# EAGLE board Battery Detector v1.0 (EAGLE 8.1.1)
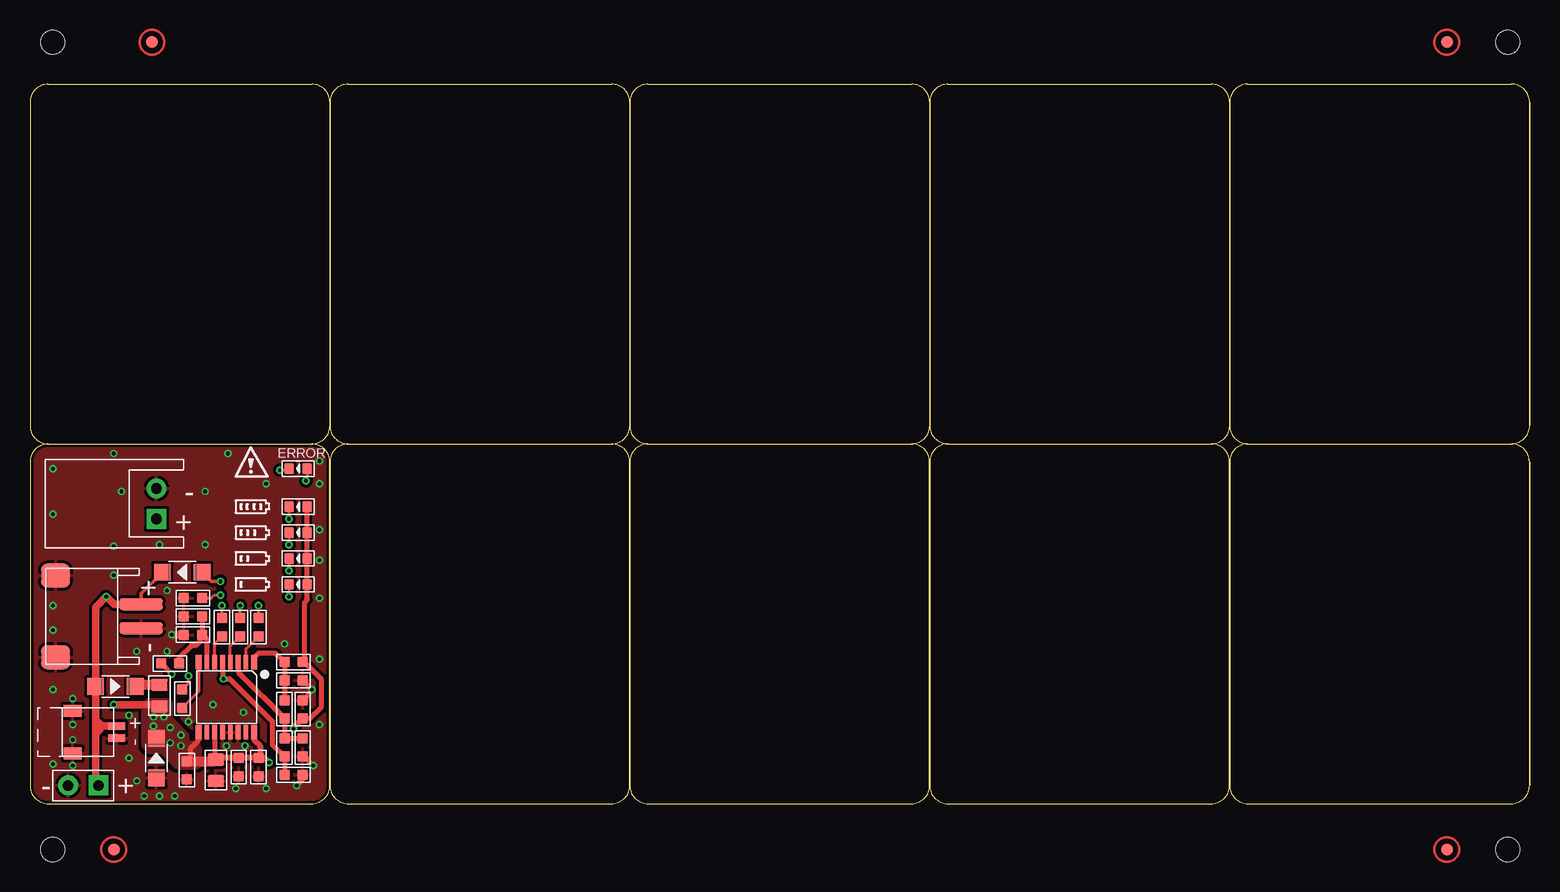
[diagram p0: board, top side]
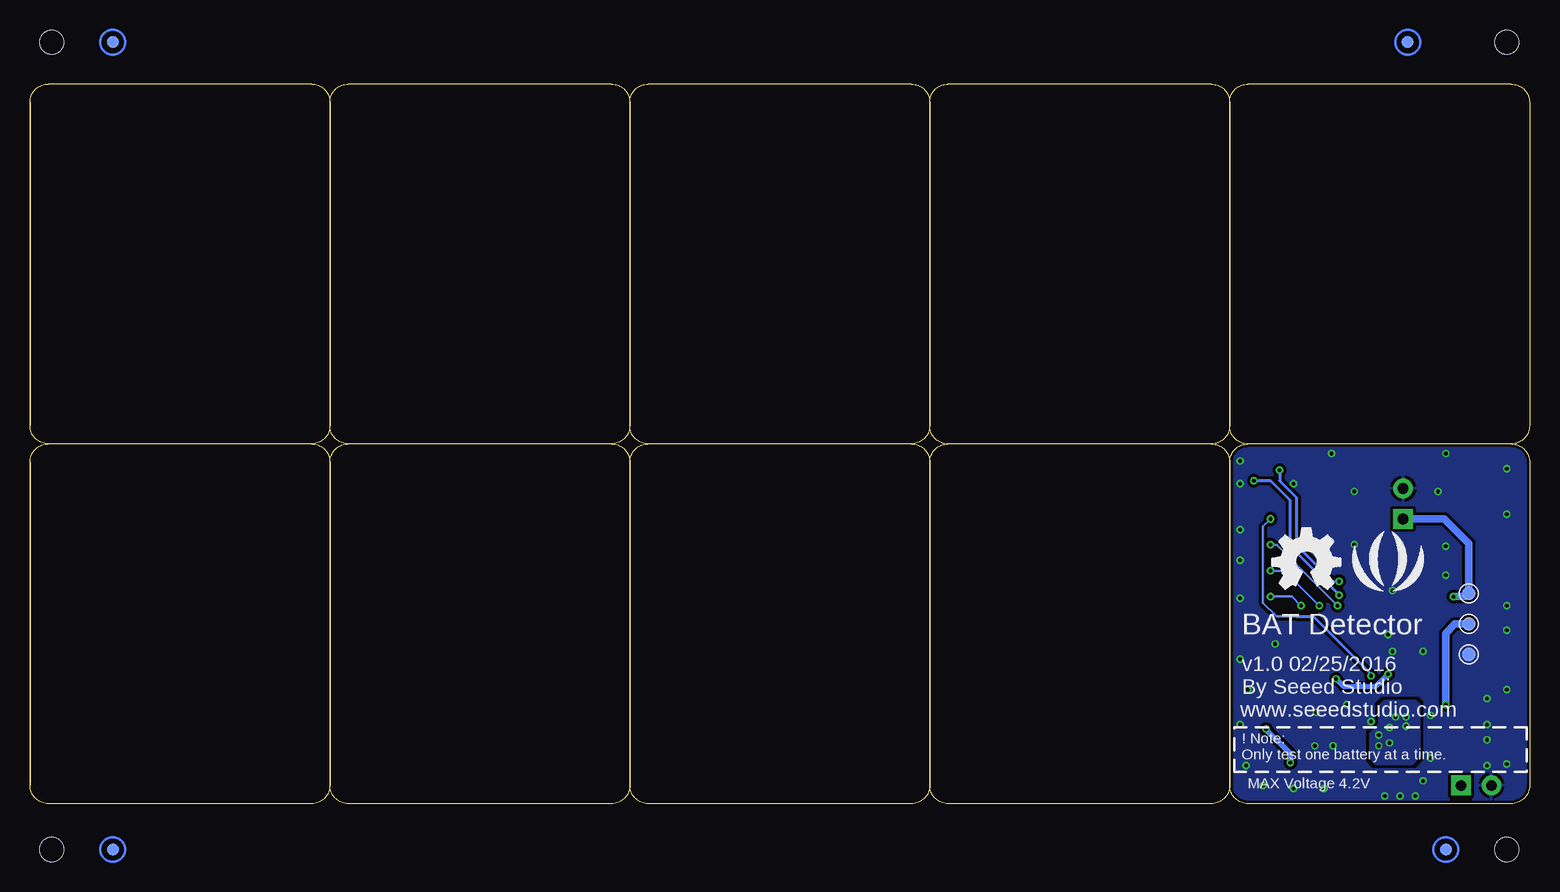
[diagram p1: board, bottom side, seen from below]

Size 125.01 x 60 mm. Coordinates in mm from the lower left corner, seen from the top.
Outline: 25,1.52 arc-90 23.48,0 1.52,0 arc-90 0,1.52 0,28.48 arc-90 1.52,30 23.48,30 arc-90 25,28.48
Outline: 25,1.52 25,28.48
Outline: 25,28.48 25,1.52
Outline: 25,1.52 arc90 26.52,0 48.48,0 arc90 50,1.52 50,28.48 arc90 48.48,30 26.52,30 arc90 25,28.48
Outline: 75,1.52 arc-90 73.48,0 51.52,0 arc-90 50,1.52 50,28.48 arc-90 51.52,30 73.48,30 arc-90 75,28.48
Outline: 75,1.52 75,28.48
Outline: 75,28.48 75,1.52
Outline: 75,1.52 arc90 76.52,0 98.48,0 arc90 100,1.52 100,28.48 arc90 98.48,30 76.52,30 arc90 75,28.48
Outline: 125,1.53 arc-90 123.48,0 101.53,0 arc-90 100,1.53 100,28.48 arc-90 101.53,30 123.48,30 arc-90 125,28.48
Outline: 125,1.53 125,28.48
Outline: 125,28.48 125,1.53
Outline: 25.01,31.52 arc-90 23.48,30 1.53,30 arc-90 0.01,31.52 0.01,58.48 arc-90 1.53,60 23.48,60 arc-90 25.01,58.48
Outline: 25.01,31.52 25.01,58.48
Outline: 25.01,58.48 25.01,31.52
Outline: 25.01,31.52 arc90 26.53,30 48.48,30 arc90 50.01,31.52 50.01,58.48 arc90 48.48,60 26.53,60 arc90 25.01,58.48
Outline: 75.01,31.52 arc-90 73.48,30 51.53,30 arc-90 50.01,31.52 50.01,58.48 arc-90 51.53,60 73.48,60 arc-90 75.01,58.48
Outline: 75.01,31.52 75.01,58.48
Outline: 75.01,58.48 75.01,31.52
Outline: 75.01,31.52 arc90 76.53,30 98.48,30 arc90 100.01,31.52 100.01,58.48 arc90 98.48,60 76.53,60 arc90 75.01,58.48
Outline: 125.01,31.53 arc-90 123.48,30 101.53,30 arc-90 100.01,31.53 100.01,58.48 arc-90 101.53,60 123.48,60 arc-90 125.01,58.48
Outline: 125.01,31.53 125.01,58.48
Outline: 125.01,58.48 125.01,31.53
Copper layers (1*16): Top 0.035mm / dielectric 1.5mm / Bottom 0.035mm
Design rules "SeeedStudio_2layer_DRU_no_angle_20140221 *": minimum track width 5mil, minimum drill 12mil, track to track 6mil, track to pad 6mil, pad to pad 6mil, via to via 6mil, smd to smd 0mil, copper to edge 10mil, drill to drill 10mil, minimum pad ring 10mil, minimum via ring 6mil, stop-mask expansion 2mil, vias tented up to drill 25mil, thermal gap 10mil
Holes 2 mm at 1.91,-3.81 123.19,-3.81 123.19,63.5 1.91,63.5

## Footprints (pad centres in the part's own frame; a part is rotated, then mirrored left to right if it is on the bottom)
C0603 = smd 0.889 x 0.889: 1 0,0.762; 2 0,-0.762
C0805 = smd 1.397 x 1.016: 1 0,0.889; 2 0,-0.889
LED-0603 = smd 0.762 x 0.889: + -0.762,0; - 0.762,0
SOD-123 = smd 1.397 x 1.397: + -1.651,0; - 1.651,0
HW2-SMD-1.0-90D = smd 1.524 x 1.016: 3 -3.429,1.778; 4 -3.429,-1.778 | smd 1.397 x 0.635: + 0.254,0.508; - 0.254,-0.508
HW2-SMD-2.0-90D = smd 2 x 2.4: 3 3.4,-2.181; 4 -3.4,-2.181 | smd 1 x 3.6: + -1,4.953; - 1,4.953
JST2-2.54-90D = drill 0.889 pad 1.651 square: + 2.286,-1.27 | drill 0.889 pad 1.651: - 2.286,1.27
H2-2.54 = drill 0.889 pad 1.651 square: 1 0,1.27 | drill 0.889 pad 1.651: 2 0,-1.27
ROUND-MARK-1.0 = smd 1.016 x 1.016: P$1 0,0
R0603 = smd 0.889 x 0.889: 1 0,0.762; 2 0,-0.762
R0805 = smd 1.397 x 1.016: 1 0,0.889; 2 0,-0.889
TP-D45MIL = smd 1.143 x 1.143: T 0,0
TSSOP16-0.65-5X4.4MM = smd 0.5 x 1.2: 1 -2.325,-2.925; 8 2.325,-2.925; 9 2.325,2.925; 16 -2.325,2.925 | smd 0.4 x 1.2: 2 -1.625,-2.925; 3 -0.975,-2.925; 4 -0.325,-2.925; 5 0.325,-2.925; 6 0.975,-2.925; 7 1.625,-2.925; 10 1.625,2.925; 11 0.975,2.925; 12 0.325,2.925; 13 -0.325,2.925; 14 -0.975,2.925; 15 -1.625,2.925

## Placement (x,y rotation side)
C1  DNP  [C0603]  17.4,3.05 180 top
C2  100nF  [C0603]  19.05,3.05 180 top
C3  10uF  [C0805]  15.49,2.79 0 top
C4  100nF  [C0603]  13.08,2.79 180 top
C5  DNP  [C0603]  22.73,7.87 0 top
C6  DNP  [C0603]  21.97,10.29 270 top
C7  DNP  [C0603]  22.73,4.7 180 top
C8  DNP  [C0603]  21.97,2.41 270 top
C9  DNP  [C0603]  13.59,14.1 90 top
D1  Green  [LED-0603]  22.35,18.29 180 top
D2  Green  [LED-0603]  22.35,20.45 180 top
D3  Green  [LED-0603]  22.35,22.61 180 top
D4  Green  [LED-0603]  22.35,24.77 180 top
D6  B5819W  [SOD-123]  7.11,9.78 0 top
D7  B5819W  [SOD-123]  12.7,19.3 180 top
D8  MMSZ4689  [SOD-123]  10.54,3.81 90 top
ERROR  RED  [LED-0603]  22.35,27.94 180 top
FR1  [SEEEDSTUDIO-PCB-FRAME]  2.67,-56.01 0 top  (outside the outline)
FR2  [SEEEDSTUDIO-PCB-FRAME]  5.97,-46.74 0 top  (outside the outline)
J1  JST-2P-SMD'1.0  [HW2-SMD-1.0-90D]  6.99,5.97 0 top
J2  JST-2P-SMD'2.0  [HW2-SMD-2.0-90D]  4.32,15.62 270 top
J3  JST-2P-DIP'2.54/90D'  [JST2-2.54-90D]  8.26,25.02 0 top
J4  DNP  [H2-2.54]  4.45,1.52 270 top
P1  [ROUND-MARK-1.0]  10.16,63.5 270 bottom  (outside the outline)
P2  [ROUND-MARK-1.0]  10.16,63.5 90 top  (outside the outline)
P3  [ROUND-MARK-1.0]  6.99,-3.81 270 bottom  (outside the outline)
P4  [ROUND-MARK-1.0]  6.99,-3.81 90 top  (outside the outline)
P5  [ROUND-MARK-1.0]  118.11,-3.81 270 bottom  (outside the outline)
P6  [ROUND-MARK-1.0]  118.11,-3.81 90 top  (outside the outline)
P7  [ROUND-MARK-1.0]  118.11,63.5 270 bottom  (outside the outline)
P8  [ROUND-MARK-1.0]  118.11,63.5 90 top  (outside the outline)
R1  430k  [R0603]  21.97,11.81 90 top
R2  22k  [R0603]  21.21,7.87 180 top
R3  15k  [R0603]  21.21,4.7 180 top
R4  18k  [R0603]  11.68,11.68 270 top
R5  270k  [R0603]  13.59,15.62 90 top
R6  510R  [R0603]  17.53,14.73 180 top
R7  510R  [R0603]  16,14.73 180 top
R8  510R  [R0603]  12.7,8.76 180 top
R9  510R  [R0603]  19.05,14.73 180 top
R10  1k  [R0603]  13.59,17.14 270 top
R11  22R  [R0805]  10.79,9.02 180 top
TP1  DNP  [TP-D45MIL]  5.08,17.53 0 bottom
TP2  DNP  [TP-D45MIL]  5.08,12.45 0 bottom
TP3  DNP  [TP-D45MIL]  5.08,14.99 0 bottom
U1  CN1185  [TSSOP16-0.65-5X4.4MM]  16.38,8.89 180 top
U$7  [SEEED-SILK-280*268MIL]  11.81,19.43 0 bottom
U$8  [OSHW_FILLX200_NOTEXT]  21.44,17.91 0 bottom

## Library data of the parts
C1-C9 D1-D4 D6-D8 ERROR R1-R11 TP1-TP3 = Discrete-new
FR1 FR2 = moudle-new
J1-J4 = Connector-new
P1-P8 = Discrete-new; PARTNO: DNP
U1 = template; MPN: CN1185
U$7 U$8 = Logo

## Nets
GND: C1.1 C2.1 C3.2 C4.1 C5.1 C6.1 C7.1 C8.1 C9.1 D8.+ J1.3 J1.4 J1.- J2.3 J2.4 J2.- J3.- J4.2 R5.1 R10.2 TP2.T U1.12 U1.13 U1.14
N$1: R7.1 U1.6
N$2: D6.- R11.2
N$3: C6.2 R1.1 R2.2 U1.1
N$4: C7.2 R2.1 R3.2 U1.3
N$5: C8.2 R3.1 R4.2 U1.5
N$6: R9.1 U1.2
N$7: R6.1 U1.4
N$8: R8.1 U1.8
N$9: D6.+ D7.- J1.+ J2.+ J3.+ J4.1 TP1.T
N$10: D1.- R9.2
N$11: C9.2 R4.1 R5.2 U1.7
N$12: D2.- R6.2
N$14: D3.- R7.2
N$16: D4.- R8.2
N$17: ERROR.+ R10.1
N$18: D7.+ ERROR.-
VCC: C1.2 C2.2 C3.1 C4.2 C5.2 D1.+ D2.+ D3.+ D4.+ D8.- R1.2 R11.1 TP3.T U1.9 U1.11 U1.16

## Tracks (layer width: path | path; a pad name or v marks a point on that pad's centre or on a via)
GND  (via drill 0.3)
  Top 0.406: C6.1 v23.5,9.53 23.5,9.4 C5.1 | C7.1 22.86,3.94 v23.62,3.17 | C8.1 22.73,2.03 v22.23,1.52
  Top 0.61: C9.1 v11.81,14.1
  other vias: 19.68,26.67 14.61,26.04 21.21,13.34 8.89,12.7 11.43,12.7 1.91,9.53 1.91,3.3 8.26,3.81 8.26,7.37 13.21,6.86 15.24,8.26 17.78,7.62 8.89,1.91 17.14,1.27 19.68,1.27 24.13,6.6 6.99,21.46 6.99,19.05 10.79,21.59 1.91,24.13 1.91,27.94 1.91,16.51 1.91,14.48 6.99,29.21 16.51,29.21 24.13,28.57 24.13,26.67 24.13,22.86 24.13,20.32 24.13,17.14 24.13,12.06 14.61,21.59 11.43,17.78 16.38,4.83 17.91,4.83 3.56,5.33 3.56,6.6 3.56,8.76 3.56,3.17 7.62,26.04 10.79,0.64 9.53,0.64 12.06,0.64
  pour Top (isolate 0.254, rank 3): 3.81,30.86 25.91,30.86 25.91,-0.76 -1.27,-0.76 -1.27,30.99 3.81,30.99
  pour Bottom (isolate 0.254, rank 3): 4.57,31.24 26.67,31.24 26.67,-0.38 -0.51,-0.38 -0.51,31.37 4.57,31.37
N$1
  Top 0.254: U1.6 15.41,13.38 R7.1
N$2
  Top 0.813: R11.2 8.89,9.91 D6.-
N$3
  Top 0.406: U1.1 18.71,12.23 19.05,12.57 20.45,12.57 R1.1 C6.2 R2.2
N$4
  Top 0.406: C7.2 R3.2 R2.1 17.36,10.96 U1.3
N$5  (via drill 0.3)
  Top 0.406: U1.5 16.06,10.48 v16.13,10.41 16.64,10.41 20.19,6.86 20.19,4.95 R3.1 C8.2 | R4.2 v11.81,10.79
  Bottom 0.406: v16.13,10.41 15.49,9.78 12.83,9.78 v11.81,10.79
N$6
  Top 0.254: U1.2 18.01,12.93 R9.1
N$7
  Top 0.254: U1.4 16.71,13.15 R6.1
N$8
  Top 0.254: U1.8 14.06,9.36 R8.1
N$9  (via drill 0.3)
  Top 0.305: D7.- 9.27,17.53 J2.+
  Top 0.61: J2.+ 7,16.62 v6.35,17.27 5.46,16.38 D6.+ 5.46,6.99 | 5.46,6.99 5.46,6.35 | 5.46,6.35 5.46,1.78 J4.1 | J1.+ 6.1,6.48 | 5.97,6.48 5.59,6.48 5.46,6.35 | 6.1,6.48 5.97,6.48 | 5.97,6.48 5.46,6.99 | 6.1,6.48 5.59,5.97
  Bottom 0.61: v6.35,17.27 5.33,17.27 TP1.T 5.08,21.72 7.11,23.75 J3.+
N$10  (via drill 0.3, 0.3 pad 0.64)
  Top 0.203: v21.59,17.27 D1.-
  Top 0.254: R9.2 v19.05,16.51
  Bottom 0.203: v19.05,16.51 19.81,17.27 v21.59,17.27
N$11
  Top 0.406: U1.7 14.76,13.69 C9.2 | R5.2 C9.2 | R4.1 12.45,12.19 13.46,13.21 13.84,13.21 14.22,13.59 14.22,13.97 C9.2
N$12  (via drill 0.3, 0.3 pad 0.64)
  Top 0.203: v21.59,19.43 D2.-
  Top 0.254: R6.2 v17.53,16.51
  Bottom 0.203: v17.53,16.51 20.45,19.43 v21.59,19.43
N$14  (via drill 0.3, 0.3 pad 0.64)
  Top 0.203: v21.59,21.59 D3.-
  Top 0.254: R7.2 v16,16.51
  Bottom 0.203: 21.36,21.59 v21.59,21.59 21.08,21.59 v16,16.51
N$16  (via drill 0.3, 0.3 pad 0.64)
  Top 0.203: v21.59,23.75 D4.-
  Top 0.254: v13.21,10.67 13.21,10.03 R8.2
  Bottom 0.203: 19.43,15.62 21.08,15.62 22.23,16.76 22.23,23.11 v21.59,23.75
  Bottom 0.254: v13.21,10.67 13.21,10.79 18.03,15.62 19.43,15.62
N$17  (via drill 0.3)
  Top 0.254: R10.1 15.11,17.14 15.37,17.4 v15.88,17.4 | ERROR.+ 23.11,27.05 v22.99,26.92
  Bottom 0.254: v15.88,17.4 19.94,21.46 19.94,25.27 21.59,26.92 v22.99,26.92
N$18  (via drill 0.3)
  Top 0.254: ERROR.- 21.46,27.81 v20.83,27.81
  Top 0.305: D7.+ 15.11,18.54 v15.88,18.54
  Bottom 0.254: v15.88,18.54 16.38,18.54 19.43,21.59 19.43,25.53 20.83,26.92 v20.83,27.81
VCC  (via drill 0.3)
  Top 0.406: C5.2 23.37,7.11 24.26,8 24.26,10.41 22.86,11.81 R1.2 22.86,11.94 22.86,16.76 23.11,17.02 D1.+ D2.+ D3.+ D4.+ | U1.11 15.41,3.77 C3.1 | U1.9 14.06,5.29 13.34,4.57 13.34,3.94
  Top 0.508: U1.16 18.71,5.29 19.18,4.83 19.18,3.94 C2.2 | C2.2 C1.2 15.62,3.81 C3.1 | C2.2 19.56,3.81 v19.94,3.43 | v21.97,6.22 21.97,6.35 C5.2
  Top 0.61: 10.41,5.59 D8.- 10.54,5.59 | 10.29,8.26 10.67,8.26 | 10.41,8.13 10.29,8.26 | v6.99,8.26 10.29,8.26
  Top 0.813: C4.2 15.37,3.56 C3.1
  Bottom 0.508: v19.94,3.43 19.94,4.19 v21.97,6.22
  Bottom 0.61: TP3.T 6.22,14.99 6.99,14.22 v6.99,8.26
  other vias: 10.29,7.24 10.29,6.48 11.18,7.24 11.68,6.35 11.68,5.08 12.57,5.71 12.57,4.83
  pour Top (isolate 0.254, no thermals): 9.91,8.64 11.43,8.64 11.56,8.51 11.68,8.38 11.68,7.62 11.68,7.11 13.08,5.71 13.08,5.21 13.21,5.08 13.72,5.08 14.1,4.7 14.1,3.3 13.84,3.05 12.32,3.05 11.05,4.32 10.03,4.32 9.53,4.83 9.53,8.26
  pour Bottom (isolate 0.254): 10.03,8.64 12.06,8.64 12.57,8.13 12.57,6.6 13.34,5.84 13.34,3.81 12.83,3.3 9.78,3.3 9.14,3.94 9.14,8.26 9.53,8.64

## Text on the board
tPlace: ERROR | - | + | + | - | + | - | - | +
bPlace: BAT Detector | v1.0 02/25/2016 | By Seeed Studio | www.seeedstudio.com | ! Note: / Only test one battery at a time. | MAX Voltage 4.2V